# Altium PCB Bevattningssystem Design 1.PcbDoc
Units mil, origin at the board's own origin, x right, y up, seen from the top; angles counter-clockwise.
Board outline 6000 x 5000 mil, 2 copper layers (Top Layer, Bottom Layer); 39 components, 31 nets, 147 pads, 0 vias.
Unrouted connection lines stored in the file: 92.
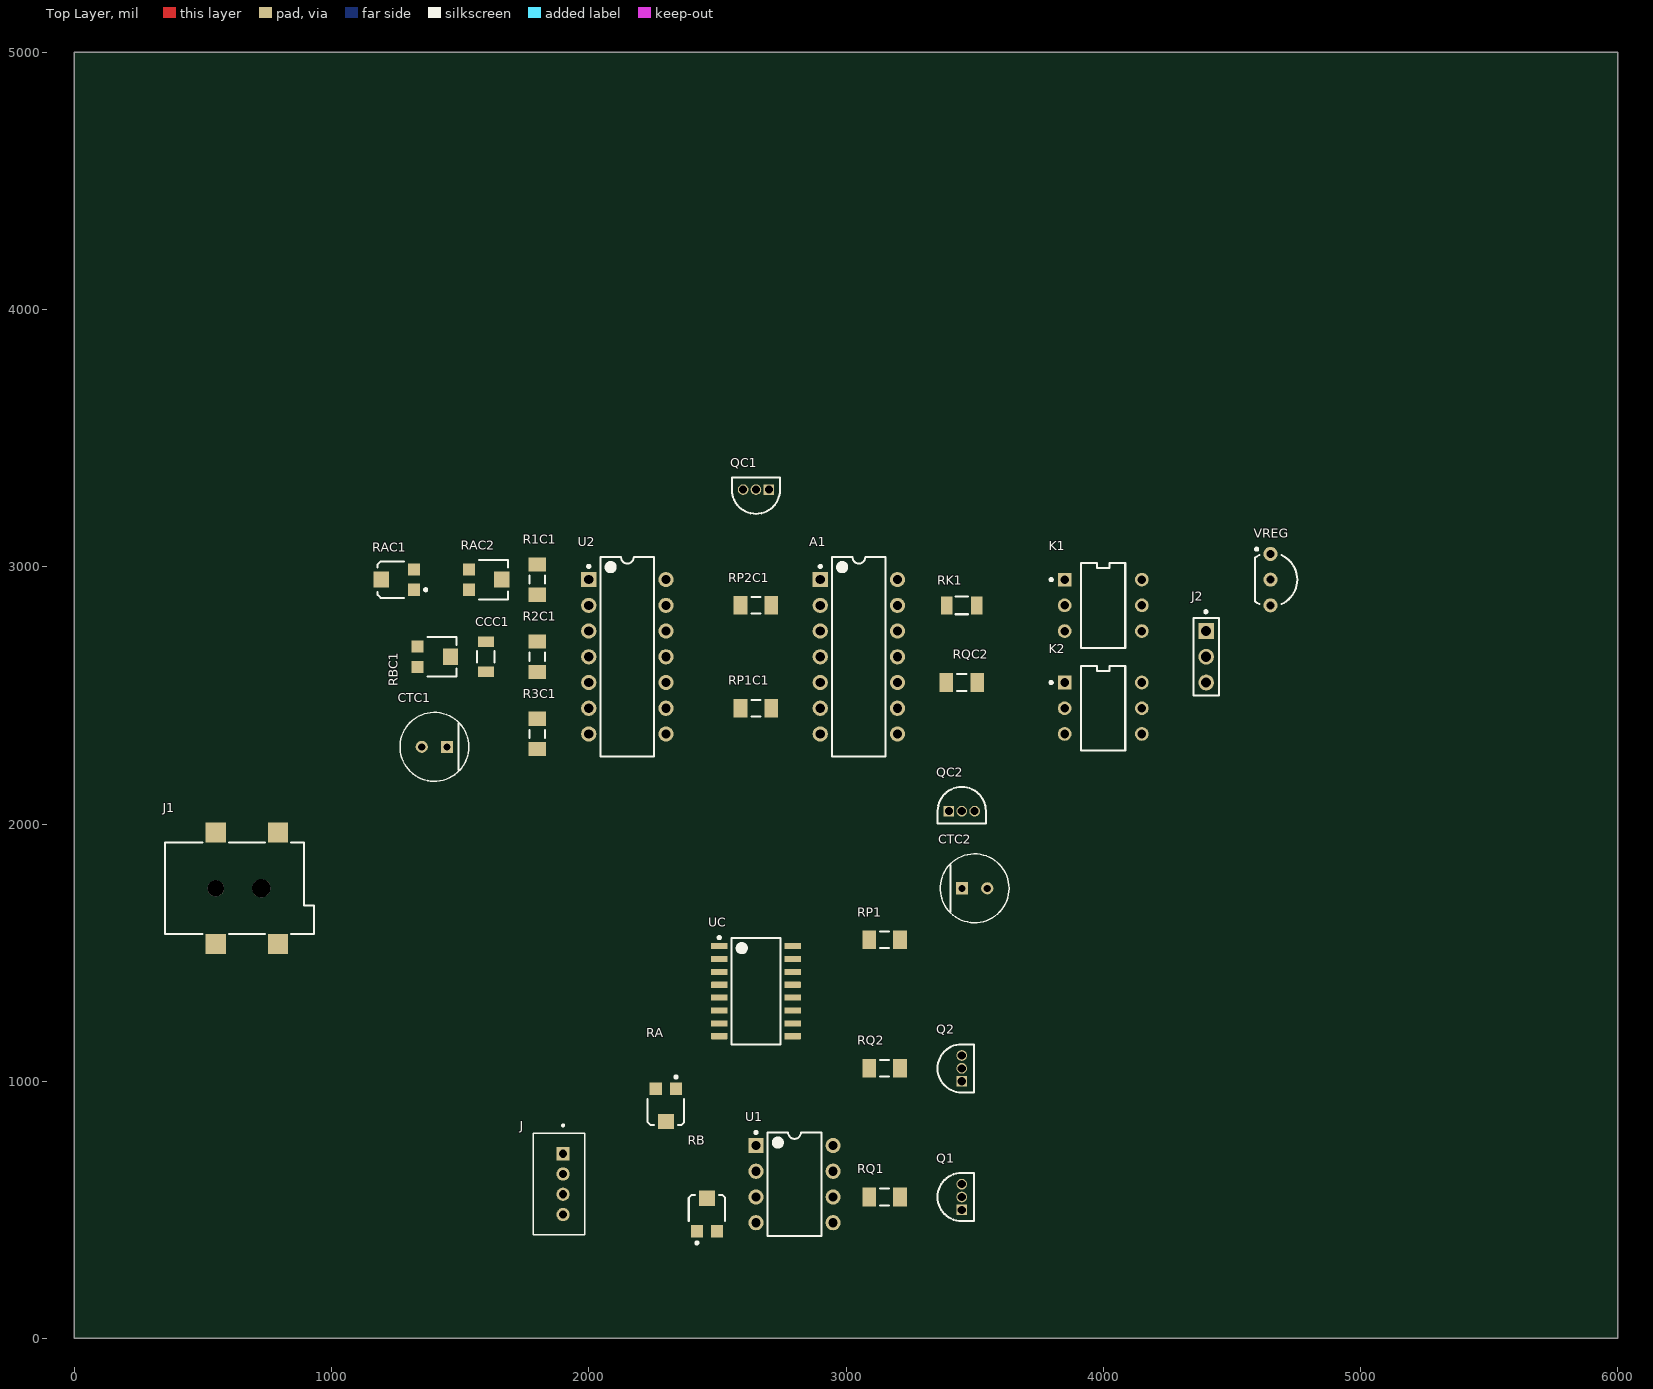
[diagram p0: Top Layer view]
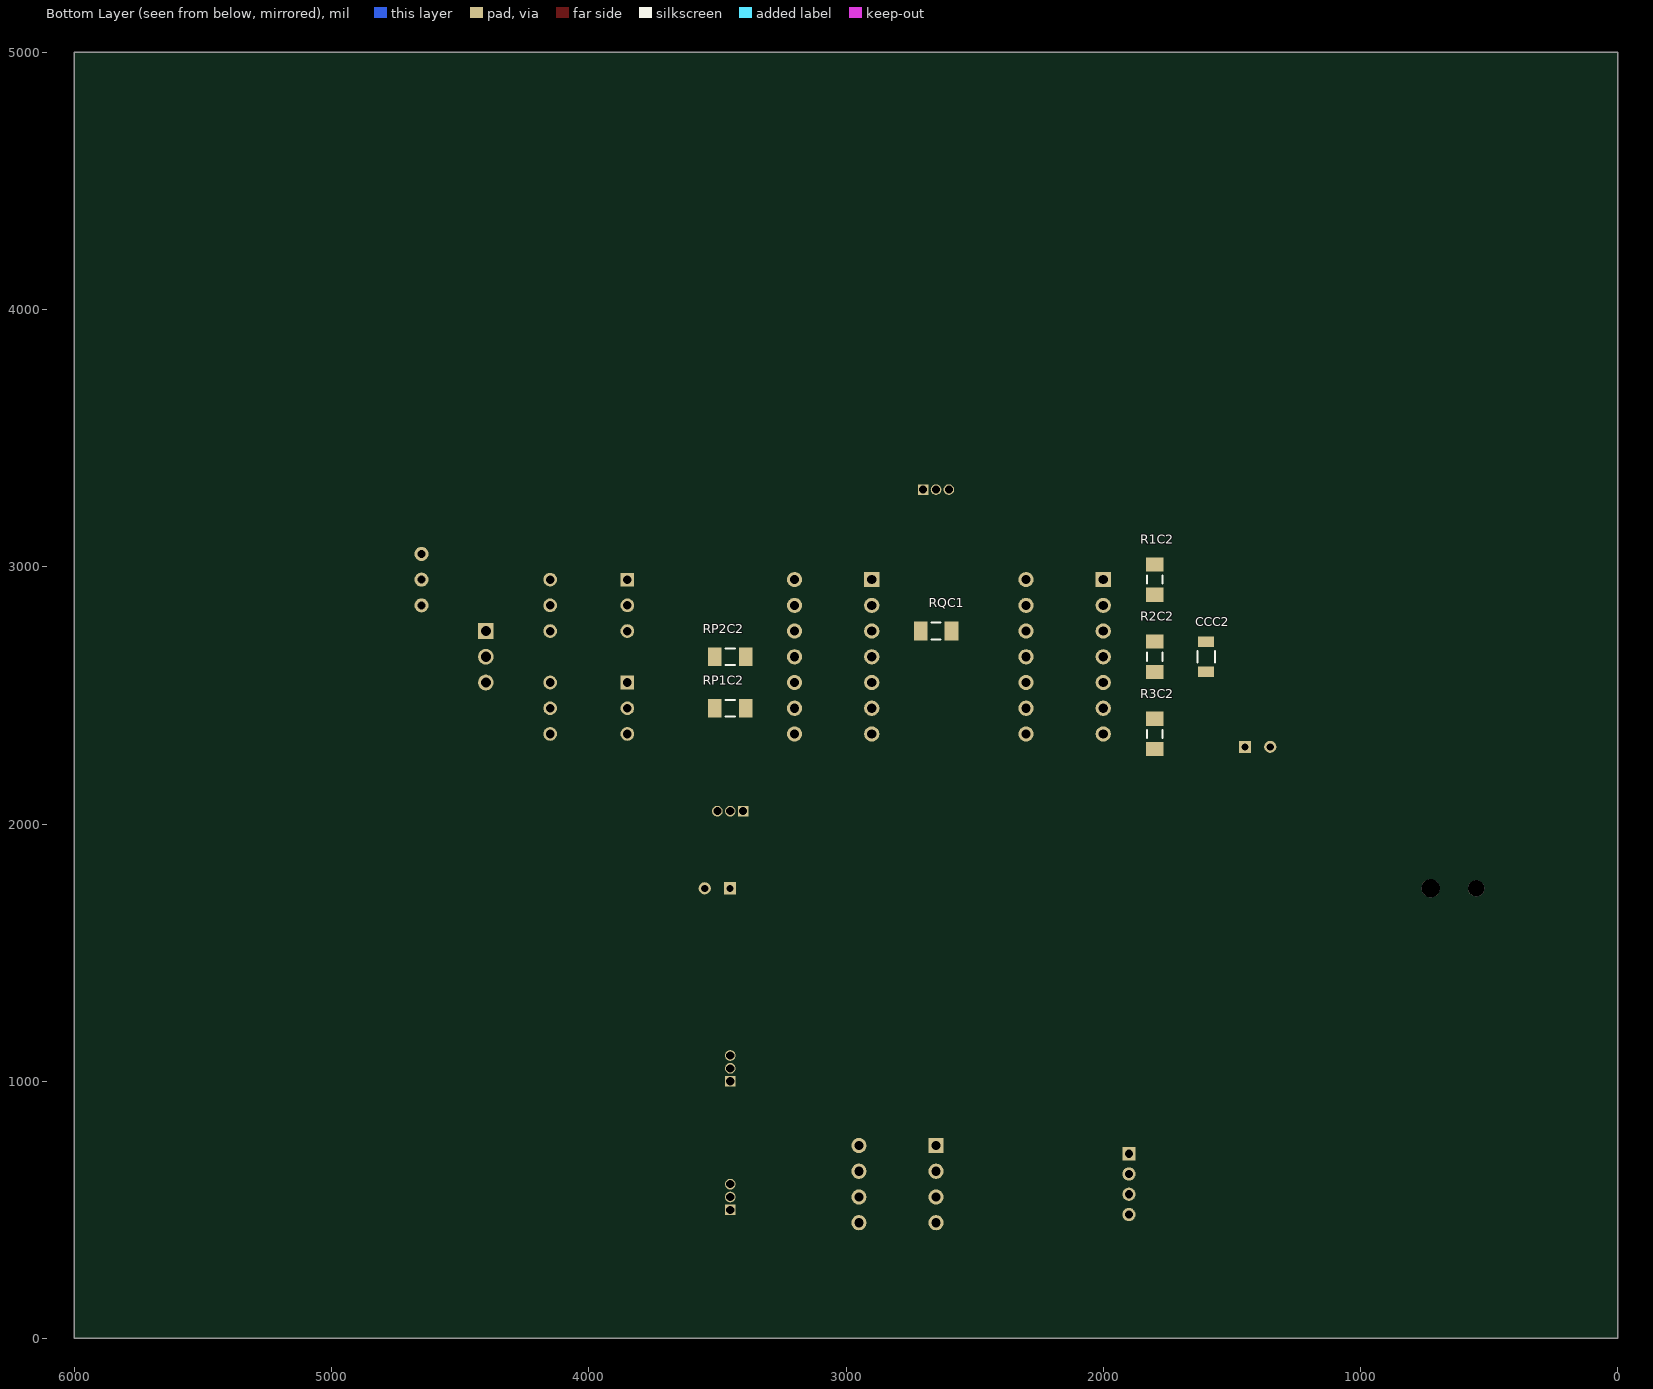
[diagram p1: Bottom Layer view, seen from below]

## Layer stack, top to bottom
Top Solder: solder mask 0.4, Solder Resist, Dk 3.5
Top Layer: signal copper 1.4
Dielectric 1: dielectric 12.6, FR-4, Dk 4.8
Bottom Layer: signal copper 1.4
Bottom Solder: solder mask 0.4, Solder Resist, Dk 3.5

## Board outline
0,0 0,5000 6000,5000 6000,0

## Design rules (kind name [scope] priority, off if disabled: settings)
Clearance [All] p1: gap=10 ignorepadtopadclearanceinfootprint=FALSE
PolygonConnect [All] p1: connectstyle=Relief reliefconductorwidth=10 reliefentries=4 polygonreliefangle="90 Angle" airgapwidth=10
RoutingVias [All] p1: holewidth=28 width=50 viastyle="Through Hole" minholewidth=28 minwidth=50 maxholewidth=28 maxwidth=50
SolderMaskExpansion [All] p1: expansion=4 istentingtop=FALSE
Width [All] p1: maxlimit=10 minlimit=10 preferedwidth=10
30 further rules are at their usual default settings.

## Classes and differential pairs
net class VREG_Nets: GND VCC VCC5
net class UC_Nets: GND NetRQ2_1 NetUC_1 NetUC_2 NetUC_4 NetUC_5 NetUC_6 NetUC_7 NetUC_9 NetUC_12 NetUC_13 NetUC_14 NetUC_15 "Signal Out c1" VCC5
net class U2_Nets: "Control c1" "Control c2" "Discharge c2" GND NetA1_2 NetA1_6 NetA1_9 NetA1_11 NetQ2_3 NetR2C1_2 NetR2C2_2 NetU2_3 NetU2_12 "Threshold c1" VCC
net class U1_Nets: GND NetRA_1 NetRQ1_1 NetU1_1 NetU1_5 NetU1_8 Sensor VCC5
net class RQC2_Nets: NetQC2_2 ~QC2
net class RQC1_Nets: NetQC1_2 ~QC1
net class RQ2_Nets: NetQ2_2 NetRQ2_1
net class RQ1_Nets: NetQ1_2 NetRQ1_1
net class RP2C2_Nets: NetA1_11 VCC5
net class RP2C1_Nets: NetA1_2 VCC5
net class RP1C2_Nets: NetA1_9 VCC5
net class RP1C1_Nets: NetA1_6 VCC5
net class RP1_Nets: NetQ2_3 VCC5
net class RK1_Nets: NetK1_1 "Signal Out c2"
net class RBC1_Nets: "Discharge c1" NetRBC1_2 "Threshold c1"
net class RB_Nets: GND NetRA_1 NetRB_2
net class RAC2_Nets: "Discharge c2" NetRAC2_2 VCC
net class RAC1_Nets: "Discharge c1" NetRAC1_2 VCC
net class RA_Nets: NetRA_1 NetRA_2 VCC5
net class R3C2_Nets: GND NetR2C2_2
net class R3C1_Nets: GND NetR2C1_2
net class R2C2_Nets: "Control c2" NetR2C2_2
net class R2C1_Nets: "Control c1" NetR2C1_2
net class R1C2_Nets: "Control c2" VCC
net class R1C1_Nets: "Control c1" VCC
net class QC2_Nets: "Discharge c2" GND NetQC2_2
net class QC1_Nets: "Discharge c1" GND NetQC1_2
net class Q2_Nets: NetQ1_3 NetQ2_2 NetQ2_3
net class Q1_Nets: GND NetQ1_2 NetQ1_3
net class K2_Nets: GND NetJ2_2 NetK1_1 NetK2_3 VCC5
net class K1_Nets: GND NetJ2_1 NetK1_1 NetK1_3 VCC
net class J_Nets: GND Sensor VCC5
net class J2_Nets: GND NetJ2_1 NetJ2_2
net class J1_Nets: GND NetJ1_3 VCC
net class CTC2_Nets: "Discharge c2" GND
net class CTC1_Nets: GND "Threshold c1"
net class CCC2_Nets: "Control c2" GND
net class CCC1_Nets: "Control c1" GND
net class A1_Nets: GND NetA1_2 NetA1_6 NetA1_9 NetA1_11 "Signal Out c1" "Signal Out c2" VCC5 ~QC1 ~QC2

## Components (designator, comment, footprint, x,y, rotation, side; value= is the part's Value field where it differs from the comment)
A1 "SN74HCT02N" N0014A 3050,2650 r0 top
CCC1 "GCM3195C2A103JA16D" FP-GCM319-0_15-MFG 1600,2650 r270 top
CCC2 "GCM3195C2A103JA16D" FP-GCM319-0_15-MFG 1600,2650 r270 bottom
CTC1 "ECA1EHG101I" FP-RAD-TH-D_6_3_0_5-L_11-MFG 1400,2300 r180 top
CTC2 "ECA1EHG101I" FP-RAD-TH-D_6_3_0_5-L_11-MFG 3500,1750 r0 top
J "Grove B4B" SEEED_110990030 1900,600 r270 top
J1 "694106106102" 694106106102 622.83,1750 r270 top
J2 "90120-0763" FP-90120-0763-MFG 4400,2650 r270 top
K1 "PVT412LPBF" FP-PG-DIP-6-MFG 4000,2850 r0 top
K2 "PVT412LPBF" FP-PG-DIP-6-MFG 4000,2450 r0 top
Q1 "2N3904BU" FAIR-TO-92 3450,500 r90 top
Q2 "2N3904BU" FAIR-TO-92 3450,1000 r90 top
QC1 "2N3904BU" FAIR-TO-92 2700,3300 r180 top
QC2 "2N3904BU" FAIR-TO-92 3400,2050 r0 top
R1C1 "Resistor 4k7 +/-1% 1206 250 mW" RESC3116X70X50ML13T20 1800,2950 r270 top value=4.7k
R1C2 "Resistor 4k7 +/-1% 1206 250 mW" RESC3116X70X50ML13T20 1800,2950 r270 bottom value=4.7k
R2C1 "Resistor 4k7 +/-1% 1206 250 mW" RESC3116X70X50ML13T20 1800,2650 r270 top value=4.7k
R2C2 "Resistor 4k7 +/-1% 1206 250 mW" RESC3116X70X50ML13T20 1800,2650 r270 bottom value=4.7k
R3C1 "Resistor 4k7 +/-1% 1206 250 mW" RESC3116X70X50ML13T20 1800,2350 r270 top value=4.7k
R3C2 "Resistor 4k7 +/-1% 1206 250 mW" RESC3116X70X50ML13T20 1800,2350 r270 bottom value=4.7k
RA "TC33X-2-103E" BOUR-TC33X-2_V 2300,900 r270 top value=10k
RAC1 "TC33X-2-103E" BOUR-TC33X-2_V 1250,2950 r180 top value=10k
RAC2 "TC33X-2-104E" FP-TC33X-2-MFG 1600,2950 r270 top value=100k
RB "TC33X-2-103E" BOUR-TC33X-2_V 2459.61,487.65 r90 top value=10k
RBC1 "TC33X-2-104E" FP-TC33X-2-MFG 1400,2650 r270 top value=100k
RK1 "RC3216J221CS" FP-RC3216-IPC_B 3450,2850 r0 top value=220
RP1 "Resistor 10k +/-1% 1206 250 mW" RESC3216X60X45ML15T20 3150,1550 r0 top value=10k
RP1C1 "Resistor 10k +/-1% 1206 250 mW" RESC3216X60X45ML15T20 2650,2450 r0 top value=10k
RP1C2 "Resistor 10k +/-1% 1206 250 mW" RESC3216X60X45ML15T20 3450,2450 r180 bottom value=10k
RP2C1 "Resistor 10k +/-1% 1206 250 mW" RESC3216X60X45ML15T20 2650,2850 r0 top value=10k
RP2C2 "Resistor 10k +/-1% 1206 250 mW" RESC3216X60X45ML15T20 3450,2650 r180 bottom value=10k
RQ1 "Resistor 10k +/-1% 1206 250 mW" RESC3216X60X45ML15T20 3150,550 r0 top value=10k
RQ2 "Resistor 10k +/-1% 1206 250 mW" RESC3216X60X45ML15T20 3150,1050 r0 top value=10k
RQC1 "Resistor 10k +/-1% 1206 250 mW" RESC3216X60X45ML15T20 2650,2750 r180 bottom value=10k
RQC2 "Resistor 10k +/-1% 1206 250 mW" RESC3216X60X45ML15T20 3450,2550 r0 top value=10k
U1 "LM741CN/NOPB" P0008A 2800,600 r0 top
U2 "LM339AN" TI-N0014A 2150,2650 r0 top
UC "CD4020BNSR" NS0016A_N 2650,1350 r0 top
VREG "UA78M05CKCSE3" LP3 4650,2950 r180 top

## Footprints (in the part's own frame and the unit in brackets; to place one, negate y for a bottom-side part, rotate by r counter-clockwise, add the part's x,y. Pads: shape width x height; smd on the part's side, far side on the other; paste and mask are expansions set on the pad)
694106106102 [mm] "DC Power Jack Right Angled SMT ?6.4 with 4 soldering pads & pegs"
  rect 2x2 smd: 1(-5.5,4.3) 1(-5.5,-1.85) 2(5.5,-1.85) 3(5.5,4.3)
  round 1.6 hole 1.6 unplated: MH1(0,-1.85)
  round 1.8 hole 1.8 unplated: MH2(0,2.65)
  silkscreen extent -4.5,-6.85 4.5,7.85, body extent -6.25,-6.85 6.25,7.85, height 11.05
BOUR-TC33X-2_V [mm] "SMD, 3-Leads, Body 3.8x3.6mm"
  rect 1.2x1.2 smd: 1(-1.8,1) 3(-1.8,-1)
  rect 1.5x1.6 smd: 2(1.45,0)
  silkscreen extent -3.07,-1.8 1.8,1.8, body extent -2,-1.8 1.96,1.8, height 1.15
FAIR-TO-92 [mm] "TO, 3-Leads, Body Dia 4.79mm, Pitch 1.27mm"
  rect 1.05x1.05 hole 0.8 mask+0.05: 1(0,0)
  round 1.05 hole 0.8 mask+0.05: 2(1.27,0) 3(2.54,0)
  silkscreen extent -1.11,-1.21 3.65,2.4, body extent -1.11,-1.21 3.65,2.4, height 5.33
FP-90120-0763-MFG [mm]
  rect 1.55x1.55 hole 1 paste-2539.97 mask+0: 1(-2.54,0)
  round 1.55 hole 1 paste-2539.97 mask+0: 2(0,0) 3(2.54,0)
  silkscreen extent -4.57,-1.27 3.81,1.27, body extent -3.91,-1.37 3.91,1.37, height 0.25
FP-GCM319-0_15-MFG [mm]
  rect 1.05x1.6 smd paste+0 mask+0: 1(-1.475,0) 2(1.475,0)
  silkscreen extent -0.58,-0.87 0.58,0.87, body extent -2.1,-0.97 2.1,0.97, height 0.25
FP-PG-DIP-6-MFG [mm]
  rect 1.35x1.35 hole 0.85 paste-2539.97 mask+0: 1(-3.81,2.54)
  round 1.35 hole 0.85 paste-2539.97 mask+0: 2(-3.81,0) 3(-3.81,-2.54) 4(3.81,-2.54) 5(3.81,0) 6(3.81,2.54)
  silkscreen extent -5.26,-4.19 2.18,4.19, body extent -4.58,-4.54 4.58,4.54, height 0.25
FP-RAD-TH-D_6_3_0_5-L_11-MFG [mm]
  rect 1.2x1.2 hole 0.7 paste-2539.97 mask+0: 1(-1.25,0)
  round 1.2 hole 0.7 paste-2539.97 mask+0: 2(1.25,0)
  silkscreen extent -3.4,-3.4 3.4,3.4, body extent -3.5,-3.5 3.5,3.5, height 0.25
FP-RC3216-IPC_B [mil]
  rect 45.47x69.22 smd paste+0 mask+0: 1(-58.1,0) 2(58.1,0)
  silkscreen extent -24,-35 24,35, body extent -91,-44 91,44, height 10
FP-TC33X-2-MFG [mm]
  rect 1.2x1.2 smd paste+0 mask+0: 1(-1,-1.675) 3(1,-1.675)
  rect 1.6x1.5 smd paste+0 mask+0: 2(0,1.575)
  silkscreen extent -1.95,-0.7 1.95,2.18, body extent -1.8,-1.9 1.8,1.9, height 1.5
LP3 [mm] "TO, Flat Index; 3 In-Line, Formed Axial Leads; Body Dia. 4.8mm; Leads 0.56 x 0.41 mm (max)"
  round 1.4 hole 0.8: 1(0,-2.54) 2(0,0) 3(0,2.54)
  silkscreen extent -2.65,-3.13 1.52,2.41, body extent -2.65,-2.66 1.52,2.66, height 9.33
N0014A [mm] "DIP, 14-Leads, Body 19.7x6.6mm, Pitch 2.54mm"
  rect 1.5x1.5 hole 0.9: 1(-3.81,7.62)
  round 1.5 hole 0.9: 2(-3.81,5.08) 3(-3.81,2.54) 4(-3.81,0) 5(-3.81,-2.54) 6(-3.81,-5.08) 7(-3.81,-7.62) 8(3.81,-7.62) 9(3.81,-5.08) 10(3.81,-2.54) 11(3.81,0) 12(3.81,2.54) 13(3.81,5.08) 14(3.81,7.62)
  silkscreen extent -3.93,-9.85 2.65,9.85, body extent -3.95,-9.85 3.95,9.85, height 5.08
NS0016A_N [mm] "SOIC,16-Leads,Body 10.5x5.6mm,Pitch 1.27mm,IPC Medium Density"
  rrect17% 1.65x0.6 smd: 1(-3.625,4.445) 2(-3.625,3.175) 3(-3.625,1.905) 4(-3.625,0.635) 5(-3.625,-0.635) 6(-3.625,-1.905) 7(-3.625,-3.175) 8(-3.625,-4.445) 9(3.625,-4.445) 10(3.625,-3.175) 11(3.625,-1.905) 12(3.625,-0.635) 13(3.625,0.635) 14(3.625,1.905) 15(3.625,3.175) 16(3.625,4.445)
  silkscreen extent -3.75,-5.25 2.4,5.42, body extent -2.8,-5.25 2.8,5.25, height 2
P0008A [mm] "DIP, 8-Leads, Body 10.15x6.6mm, Pitch 2.54mm"
  rect 1.5x1.5 hole 0.9: 1(-3.81,3.81)
  round 1.5 hole 0.9: 2(-3.81,1.27) 3(-3.81,-1.27) 4(-3.81,-3.81) 5(3.81,-3.81) 6(3.81,-1.27) 7(3.81,1.27) 8(3.81,3.81)
  silkscreen extent -3.93,-5.1 2.65,5.23, body extent -3.95,-5.07 3.95,5.07, height 5.08
RESC3116X70X50ML13T20 [mm] "Chip Resistor, 2-Leads, Body 3.25x1.65mm, IPC Low Density"
  rect 1.4x1.75 smd: 1(-1.5,0) 2(1.5,0)
  silkscreen extent -0.4,-0.78 0.4,0.78, body extent -1.63,-0.82 1.63,0.82, height 0.7
RESC3216X60X45ML15T20 [mm] "Chip Resistor, 2-Leads, Body 3.3x1.75mm, IPC Low Density"
  rect 1.35x1.85 smd: 1(-1.525,0) 2(1.525,0)
  silkscreen extent -0.45,-0.82 0.45,0.82, body extent -1.65,-0.87 1.65,0.87, height 0.6
SEEED_110990030 [mm]
  rect 1.308x1.308 hole 0.8: 1(-3,0)
  round 1.308 hole 0.8: 2(-1,0) 3(1,0) 4(3,0)
  silkscreen extent -5.9,-2.95 5,2.15
TI-N0014A [mm] "DIP, 14-Leads, Body 19.7x6.6mm, Pitch 2.54mm"
  rect 1.5x1.5 hole 0.9: 1(-3.81,7.62)
  round 1.5 hole 0.9: 2(-3.81,5.08) 3(-3.81,2.54) 4(-3.81,0) 5(-3.81,-2.54) 6(-3.81,-5.08) 7(-3.81,-7.62) 8(3.81,-7.62) 9(3.81,-5.08) 10(3.81,-2.54) 11(3.81,0) 12(3.81,2.54) 13(3.81,5.08) 14(3.81,7.62)
  silkscreen extent -3.93,-9.85 2.65,9.85, body extent -3.95,-9.85 3.95,9.85, height 5.08

## Part data
A1: library part CMP-016-00012-1, "NOR Gate, HCT Series, 4-Func, 2-Input, CMOS, PDIP14", Case/Package=DIP, Load Capacitance (CL)=50pF, Max Operating Temperature=85°C, Max Supply Voltage=5.5V, Min Operating Temperature=-40°C, Min Supply Voltage=4.5V, Nominal Supply Voltage=5V, Package Body Material=Plastic, Package Equivalence Code=DIP14,.3, Package Shape=Rectangular, Package Style=IN-LINEMeter, Temperature Grade=INDUSTRIAL, Channels=4, Height - Seated (Max)=5.08mm, JESD-30 Code=R-PDIP-T14, JESD-609 Code=e4, Length=19.305mm, Logic Type="NOR GATE", Max I(ol)=4mA, Number of Inputs=2, Packaging=Rail/Tube, Pins=14, Power Supplies=5V, Prop. Delay@Nom-Sup=25ns, Propagation Delay (tpd)=25ns, Qualification Status="Not Qualified", Reach SVHC Compliant=Yes, RoHS Compliant=Yes, Schmitt Trigger=No, Surface Mount=No, Technology=CMOS, Terminal Finish=Nickel, Terminal Form="Through Hole", Terminal Pitch=2.54mm, Terminal Position=DUAL, Width=7.62mm
CCC1 CCC2: library part CMP-06035-000082-2, "Ceramic Capacitor for Automotive 10nF ±5% 100VDC C0G 1206 Paper T/R", Capacitance=10nF, Case Code (Imperial)=1206, Case Code (Metric)=3216, Dielectric=C0G, Max Operating Temperature=125°C, Min Operating Temperature=-55°C, Package Quantity=1, Ratings=AEC-Q200, Tolerance=5%, Voltage Rating=100V, Case/Package=1206, Depth=1.6mm, Height=0.85mm, Lead Free="Lead Free", Length=3.2mm, Mount="Surface Mount", Packaging="Tape and Reel", Radiation Hardening=No, Termination=SMD/SMT, Thickness=0.037inch, Voltage Rating (DC)=100V, Width=0.063inch
CTC1 CTC2: library part CMP-05427-000141-1, "Aluminum Electrolytic Capacitors (Radial Lead Type) AEC-Q200 Qualified 100uF ±20% 25V", Capacitance=100uF, Case/Package=Radial, Max Operating Temperature=105°C, Min Operating Temperature=-55°C, Package Quantity=2000, Ripple Current=130mA, Tolerance=20%, Voltage Rating=25V, Construction=RADIAL, Contact Plating=Tin, Diameter=6.3mm, Height=11.2mm, Height - Seated (Max)=0.48inch, Lead Diameter=0.5mm, Lead Pitch=2.5mm, Lead/Base Style=Straight, Length=11.2mm, Life (Hours)=1000Hour, Mount="Through Hole", Packaging="Ammo Pack", Radiation Hardening=No, RoHS Compliant=Yes, Series=NHG, Termination=Radial, Voltage Rating (DC)=25V, Width=6.3mm
J: "GROVE 2MM 4PIN VERT CONN 10PCS", Package=None, Arrow_Electronics-Purchase-URL=https://snapeda.com/shop?store=Arrow+Electronics&id=583576, Availability=Good, MF="Seeed Technology", Mouser-Purchase-URL=https://snapeda.com/shop?store=Mouser&id=583576, MP=110990030, Price=None, SnapEDA_Link=https://www.snapeda.com/parts/110990030/Seeed%20Technology%20Co.,%20Ltd/view-part/583576/?ref=snap
J1: library part CMP-1502-00177-3, Color=Black, Current Rating=5A, Flammability Rating="UL94 V-0", Insulation Resistance=100MΩ, Max Operating Temperature=85°C, Min Operating Temperature=-40°C, Operating Supply Voltage=24V, Connector Type=Power, Contact Gender=Female, Contact Material="Gold, Tin", Contact Plating=Tin, Gender=Male, Height=11.5mm, Housing Material=Polyamide, Mount="Surface Mount", NexarPartId=52645184, Number of Contacts=3, Packaging="Tape and Reel", REACH SVHC=Unknown, RoHS=Compliant, Shielding=Unshielded, Termination=SMD/SMT, Voltage Rating=24V, Voltage Rating (DC)=24V
J2: library part CMP-04776-000084-1, "CONN HEADER VERT 3POS 2.54MM", Current Rating=3A, Manufacturer=Molex, Temperature="-55°C to +125°C", Temperature Range High=+125°C, Temperature Range Low=-55°C, Voltage Rating=350V, Automotive=No, Category=Conn, ComponentLink2Description=Datasheet, ComponentLink2URL=https://www.molex.com/webdocs/datasheets/pdf/en-us/0901200763_PCB_HEADERS.pdf, Conn Gender=Male, Conn Orientation=Vertical, Contact Material=Gold,Nickel, Device Class L1=Connectors, Device Class L2="Headers and Wire Housings", Device Class L3=unset, Digikey Description="CONN HEADER VERT 3POS 2.54MM", Footprint Url=https://www.molex.com/pdm_docs/sd/901200763_sd.pdf, Height=5.8mm, Lead Free=Yes, Manufacturer Part Number=90120-0763, Mouser Description="Board-To-Board Connector, C-Grid III 90120 Series, Through Hole, Header, 3, 2.54 mm", Number of Contacts=3, Number Of Rows=1, Octopart=https://octopart.com/90120-0763-molex-655433, Package=90120-0763, Pitch=2.54mm, RoHS=TRUE
K1 K2: library part CMP-00196-65875632-1, "PVT412LPBF PVT Photovoltaic 400 V 0.12 A 35 Ohm SPST (1 Form A) Solid State Relay - DIP-6", Ambient Temperature Range High=85°C, Capacitance=12pF, Case/Package=DIP, Forward Current=25mA, Input Current=3mA, Insulation Resistance=10GΩ, Isolation Voltage=4kV, Load Current=120mA, Max Output Voltage=400V, Min Operating Temperature=-40°C, On-State Resistance=35Ω, Package Quantity=2000, Approvals=UL, Fall Time=500µs, Height=3.42mm, Lead Free="Contains Lead", Length=8.63mm, Lifecycle Status=Production, Max Input Current=25mA, Max Operating Temperature=85°C, Max Supply Voltage=400V, Mount="PCB, Through Hole", NexarPartId=65875632, Number of Channels=1, Number of Contacts=1, Number of Pins=6, Number of Poles=1, Output Current=120mA, Output Voltage=400V, Radiation Hardening=No, REACH SVHC="No SVHC", Relay Type=Relay, Resistance=35Ω, Rise Time=2ms, RMS Current (Irms)=120mA, RoHS=Compliant, Schedule B=8541408000, Termination="PC Pin", Throw Configuration="SP, SPST", Width=6.47mm
Q1 Q2 QC1 QC2: library part CMP-013-00040-1, "Small Signal Bipolar Transistor, 0.2A I(C), 40V V(BR)CEO, 1-Element, NPN, Silicon, TO-92", Collector-emitter Voltage-Max=40V, DC Current Gain-Min (hFE)=30, Frequency=300MHz, Max Collector Current=200mA, Max Operating Temperature=150°C, Package Body Material=Plastic, Package Shape=Round, Package Style=CYLINDRICALMeter, Power Dissipation-Max (Abs)=350mW, JEDEC-95 Code=TO-92, JESD-30 Code=O-PBCY-T3, Number of Elements=1, Pins=3, Polarity/Channel Type=NPN, Qualification Status="Not Qualified", Reach SVHC Compliant=Yes, RoHS Compliant=Yes, Surface Mount=No, Terminal Form="Through Hole", Terminal Position=BOTTOM, Transistor Application=SWITCHING, Transistor Element Material=SILICON, Turn-off Time-Max (toff)=250ns, Turn-on Time-Max (ton)=70ns
R1C1 R1C2 R2C1 R2C2 R3C1 R3C2: library part CMP-009-00033-5, "Chip Resistor, 4.7 KOhm, +/- 1%, 0.25 W, -55 to 155 degC, 1206 (3216 Metric)", Case/Package=1206, Max Operating Temperature=155°C, Min Operating Temperature=-55°C, Power=250mW, Tolerance=1%, Voltage Rating=200V, Mounting Technology=SM, Pins=2, RoHS Compliant=True
RA RAC1 RB: library part CMP-009-00213-1, "Trimmer, 0.1W, 10000ohm, 50V, 25% +/-Tol, -250,250ppm/Cel, 1 Turn(s), 1215", Case/Package=1215, Manufacturer Series=TC33, Max Operating Temperature=100°C, Min Operating Temperature=-40°C, Package Height=1.2mm, Package Length=3mm, Package Shape=Rectangular, Package Width=3.8mm, Power=100mW, Rated Temperature=70°C, Resistance Law=Linear, Resistor Type=TRIMMER, Temperature Coefficient (ppm/Cel)=-250,250, Tolerance=25%, Working Voltage=50V, Actuator Orientation=Vertical, Actuator Type=SCREW, Construction="Trimmer Pot", JESD-609 Code=e3, Mounting Technology="Surface Mount", Number of Turns=1, Packaging="Tape and Reel", Pins=3, Reach SVHC Compliant=Yes, RoHS Compliant=Yes, Series=TC33, Terminal Finish=Nickel, Termination=Wraparound
RAC2 RBC1: library part CMP-009-00214-1, "Trimmer, 0.1W, 100000ohm, 50V, 25% +/-Tol, -250,250ppm/Cel, 1 Turn(s), 1215", Case/Package=1215, Manufacturer Series=TC33, Max Operating Temperature=100°C, Min Operating Temperature=-40°C, Package Height=1.2mm, Package Length=3mm, Package Shape=Rectangular, Package Width=3.8mm, Power=100mW, Rated Temperature=70°C, Resistance Law=Linear, Resistor Type=TRIMMER, Temperature Coefficient (ppm/Cel)=-250,250, Tolerance=25%, Working Voltage=50V, Actuator Orientation=Vertical, Actuator Type=SCREW, Construction="Trimmer Pot", JESD-609 Code=e3, Mounting Technology="Surface Mount", Number of Turns=1, Packaging="Tape and Reel", Pins=3, Reach SVHC Compliant=Yes, RoHS Compliant=Yes, Series=TC33, Terminal Finish=Tin, Termination=Wraparound
RK1: library part CMP-009-00212-1, "Fixed Resistor, Metal Glaze/thick Film, 0.25W, 220ohm, 200V, 5% +/-Tol, 100ppm/Cel, Surface Mount, 1206", Case/Package=1206, Max Operating Temperature=155°C, Min Operating Temperature=-55°C, Package Height=0.55mm, Package Length=3.2mm, Package Shape=Rectangular, Package Width=1.6mm, Power=250mW, Rated Temperature=70°C, Resistor Type="FIXED RESISTOR", Temperature Coefficient (ppm/Cel)=100, Tolerance=5%, Working Voltage=200V, Construction=Chip, JESD-609 Code=e3, Mounting Technology="Surface Mount", Packaging="Tape and Reel", Pins=2, Reach SVHC Compliant=Yes, RoHS Compliant=Yes, Technology="METAL GLAZE/THICK FILM", Terminal Finish=Nickel
RP1 RP1C1 RP1C2 RP2C1 RP2C2 RQ1 RQ2 RQC1 RQC2: library part CMP-009-00016-5, "Chip Resistor, 10 KOhm, +/- 1%, 0.25 W, -55 to 155 degC, 1206 (3216 Metric)", Case/Package=1206, Max Operating Temperature=155°C, Min Operating Temperature=-55°C, Power=250mW, Tolerance=1%, Voltage Rating=200V, Mounting Technology=SM, Pins=2, RoHS Compliant=True
U1: library part CMP-1685-00016-2, Manufacturer="Texas Instruments", Package Reference=P0008A, PackageTopMarking=NSUZXYTTE#*LM*741CN, PowerWise=N, Code_JEDEC=MS-001-BA, ComponentLink1Description="Datasheet URL", ComponentLink1URL=http://www.ti.com/general/docs/lit/getliterature.tsp?genericPartNumber=LM741&fileType=pdf, CompType=Amplifiers, PackageDescription="MDIP, .365 x .250 x .130in, 8 Lead, .100in Pitch", PinCount=8, RoHS=Y
U2: library part CMP-014-00014-2, "Quad Differential Comparator, 2 to 30 V, 0 to 70 degC, 14-Pin DIP (N), Pb-Free (RoHS), Tube", Case/Package=PDIP, Manufacturer="Texas Instruments (TI)", Max Dual Supply Voltage=15V, Max Operating Temperature=70°C, Max Supply Voltage=30V, Min Dual Supply Voltage=1V, Min Operating Temperature=0°C, Min Supply Voltage=2V, Nominal Supply Current=500uA, Nominal Voltage Gain=106.02dB, Package Description="14-Pin Double In-line Package, Body 19.305 x 6.35 mm, Pitch 2.54 mm", Package Quantity=25, Package Reference=N-14, Power=1.05W, Datasheet URL=http://www.ti.com/general/docs/lit/getliterature.tsp?genericPartNumber=LM339A&fileType=pdf, Datasheet Version="SLCS006S, 08/2012", Elements=4, Manufacturer URL=http://www.ti.com/, Mounting Technology=TH, Package URL=http://www.ti.com/lit/ml/mpdi002c/mpdi002c.pdf, Packaging=Rail/Tube, Pins=14, RoHS Compliant=True
UC: library part CMP-1623-00611-2, "CMOS 14-Stage Ripple-Carry Binary Counter/Divider, NS0016A, LARGE T&R", F @ Nom Voltage(Max)(Mhz)=8, Generic Part Number=CD4020B, ICC @ Nom Voltage(Max)(mA)=0.03, Manufacturer="Texas Instruments", Operating Temperature Range(C)="-55 to 125", Rating=Catalog, tpd @ Nom Voltage(Max)(ns)=160, Voltage(Nom)(V)=5,10,15, Bits(#)=12, DatasheetVersion=SCHS030D, Function=Counter, Input Type=CMOS, Inputs=1, Output Drive (IOL/IOH)(Max)(mA)=1.5/-1.5, Output Type=CMOS, PackageReference=NS0016A, Schmitt Trigger=No, Technology Family=CD4000, Type=Binary, VCC(Max)(V)=18, VCC(Min)(V)=3
VREG: library part CMP-0324-00077-1, "3/4 Pin 500mA Fixed 5V Positive Voltage Regulator", Manufacturer="Texas Instruments", Code_JEDEC=TO-226-AA, ComponentLink1Description=Datasheet, ComponentLink1URL=http://www.ti.com/general/docs/lit/getliterature.tsp?genericPartNumber=UA78M05&fileType=pdf, ComponentLink2Description="URL Link1", ComponentLink2URL="Samples URL:http://www.ti.com/product/ua78m05#samples", DatasheetVersion=SLVS059Q, Eco-Plan="Pb-Free (RoHS)", Iout(Max)(A)=0.5, Iq(Typ)(mA)=6, Mounting Technology="Through Hole", PackageDescription="Plastic Cylindrical Package, Formed Lead Option (TO-92)", PackageReference=LP3, PackageVersion="revC, Oct-2001", PartNumber=UA78M05CKCSE3, Vin(Max)(V)=25, Vin(Min)(V)=7, Vout(Max)(V)=5, Vout(Min)(V)=5

## Nets (pads, with @x,y where several pads share a name; then routed paths per layer and width w, separated by ;. In a path a pad name is that pad's centre, name@x,y a point inside that pad or via, vN(x,y) a via of type N, cw(c..) or ccw(c..) an arc to the next point about the centre after c; other vN are vias at no path point)
"Control c1": CCC1.1 R1C1.2 R2C1.1 U2.6
"Control c2": CCC2.1 R1C2.2 R2C2.1 U2.8
"Discharge c1": QC1.3 RAC1.1 RBC1.1
"Discharge c2": CTC2.2 QC2.3 RAC2.3 U2.9
GND: A1.7 CCC1.2 CCC2.2 CTC1.1 CTC2.1 J1.2 J2.3 J.2 J.4 K1.2 K1.4 K2.2 K2.4 Q1.1 QC1.1 QC2.1 R3C1.2 R3C2.2 RB.1 U1.4 U2.12 UC.8 UC.11 VREG.2
NetA1_2: A1.2 RP2C1.2 U2.1
NetA1_6: A1.6 RP1C1.2 U2.2
NetA1_9: A1.9 RP1C2.2 U2.13
NetA1_11: A1.11 RP2C2.2 U2.14
NetJ2_1: J2.1 K1.5
NetJ2_2: J2.2 K2.5
NetK1_1: K1.1 K2.1 RK1.2
NetQ1_2: Q1.2 RQ1.2
NetQ1_3: Q1.3 Q2.1
NetQ2_2: Q2.2 RQ2.2
NetQ2_3: Q2.3 RP1.2 U2.10
NetQC1_2: QC1.2 RQC1.2
NetQC2_2: QC2.2 RQC2.2
NetR2C1_2: R2C1.2 R3C1.1 U2.5
NetR2C2_2: R2C2.2 R3C2.1 U2.11
NetRA_1: RA.1 RB.3 U1.2
NetRQ1_1: RQ1.1 U1.6
NetRQ2_1: RQ2.1 UC.3
Sensor: J.1 U1.3
"Signal Out c1": A1.1 A1.5 UC.10
"Signal Out c2": A1.8 A1.13 RK1.1
"Threshold c1": CTC1.2 RBC1.3 U2.4 U2.7
VCC: J1.1 K1.6 R1C1.1 R1C2.1 RAC1.3 RAC2.1 U2.3 VREG.1
VCC5: A1.14 J.3 K2.6 RA.3 RP1.1 RP1C1.1 RP1C2.1 RP2C1.1 RP2C2.1 U1.7 UC.16 VREG.3
~QC1: A1.3 A1.4 RQC1.1
~QC2: A1.10 A1.12 RQC2.1
pads on no net: J1.3 J1.MH1 J1.MH2 K1.3 K2.3 RA.2 RAC1.2 RAC2.2 RB.2 RBC1.2 U1.1 U1.5 U1.8 UC.1 UC.2 UC.4 UC.5 UC.6 UC.7 UC.9 UC.12 UC.13 UC.14 UC.15